# Altium PCB SPSGRFCpcb.PcbDoc
Units mm, origin at the board's own origin, x right, y up, seen from the top; angles counter-clockwise.
Board outline 30.48 x 30.25 mm, 2 copper layers (Top Layer, Bottom Layer); 3 components, 11 nets, 26 pads, 0 vias.
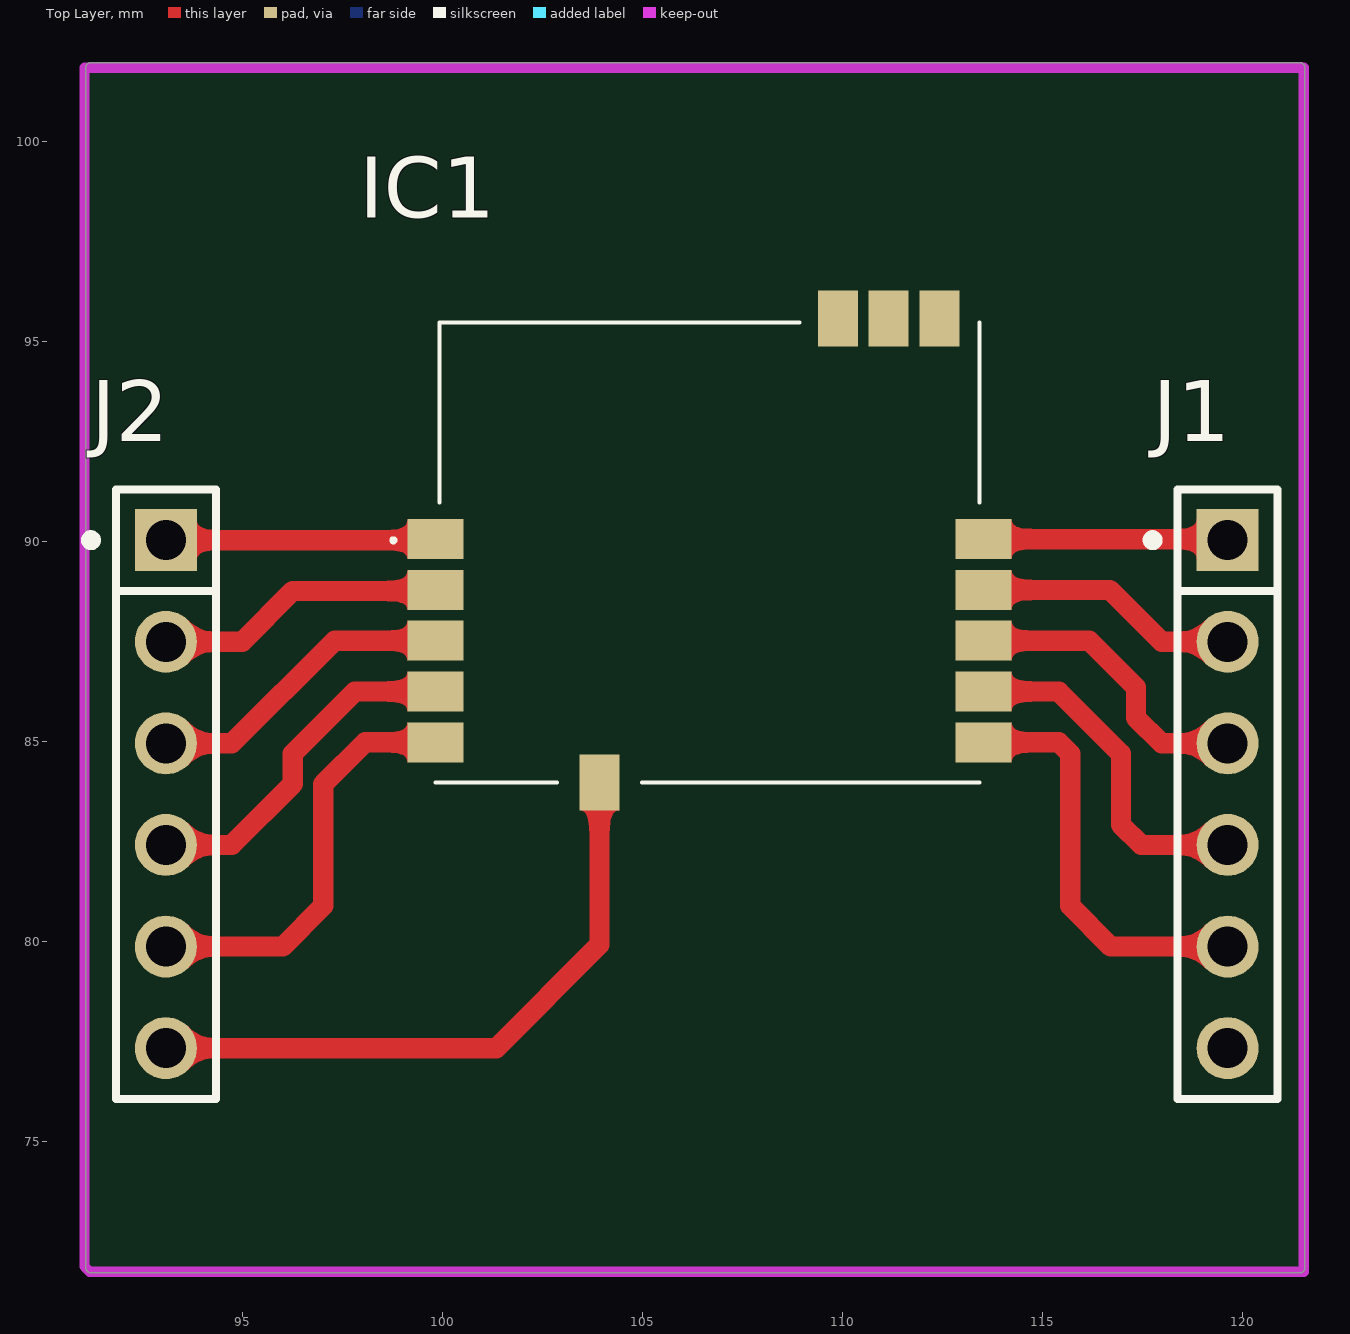
[diagram p0: Top Layer view]
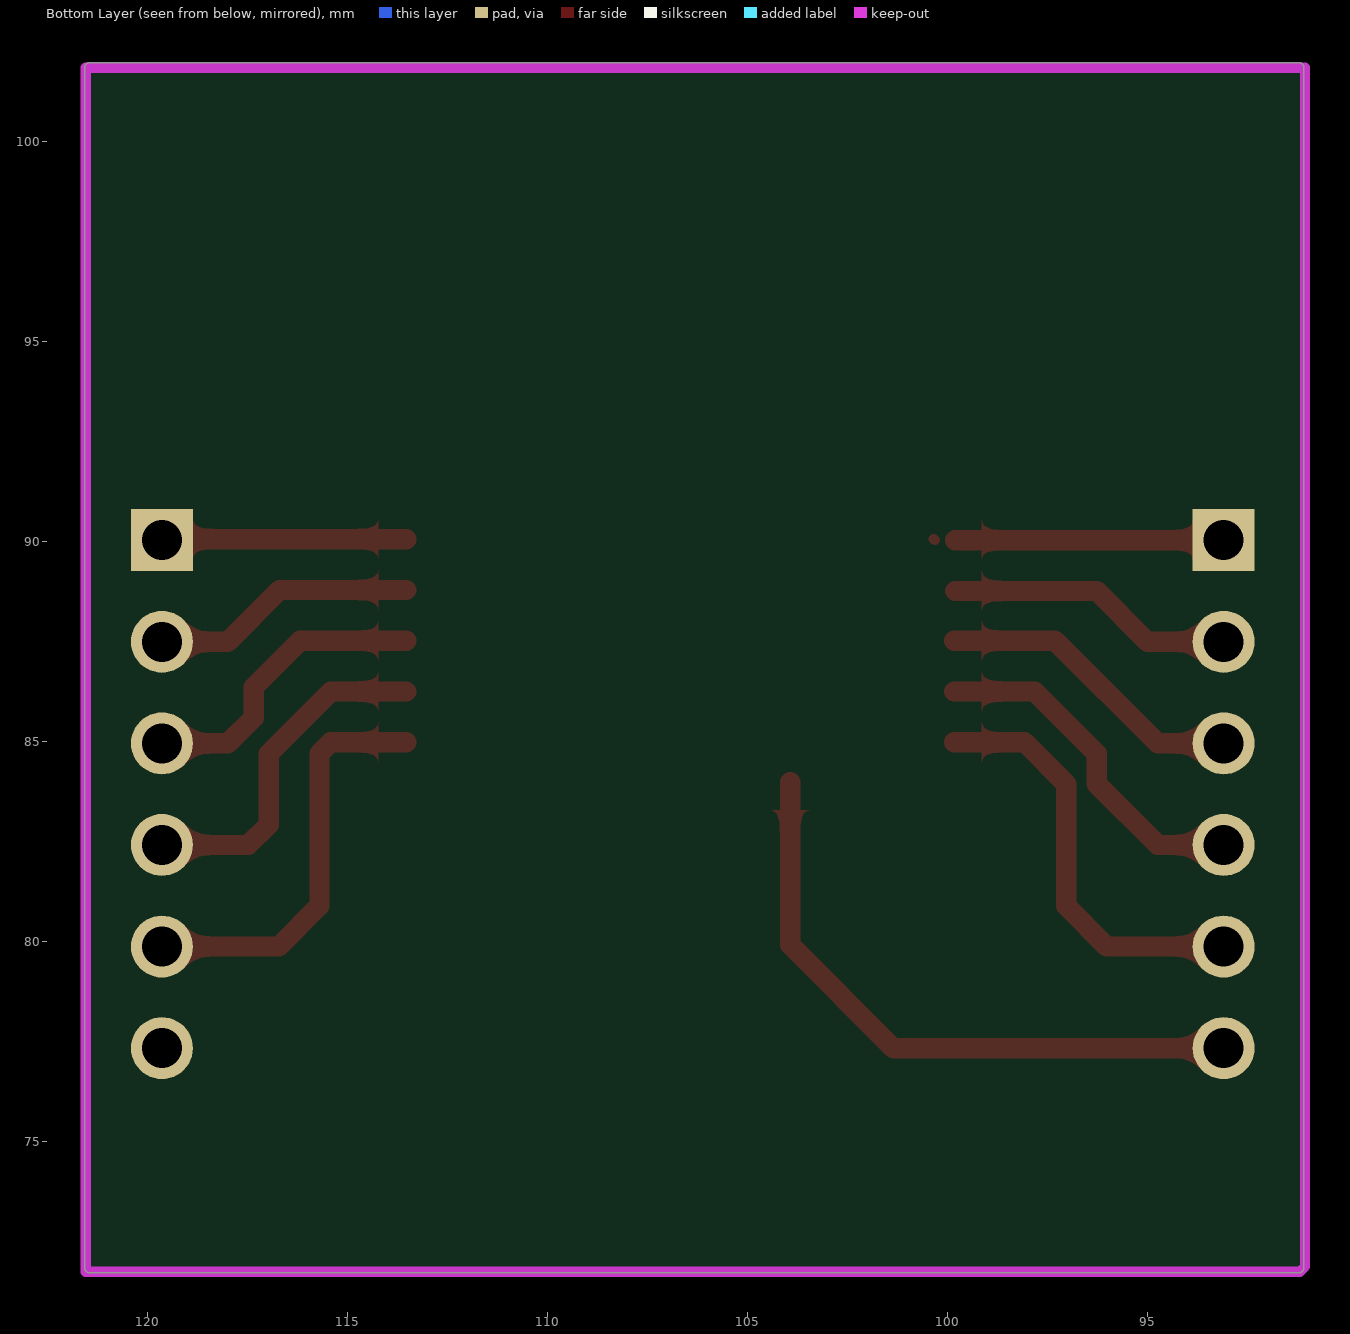
[diagram p1: Bottom Layer view, seen from below]
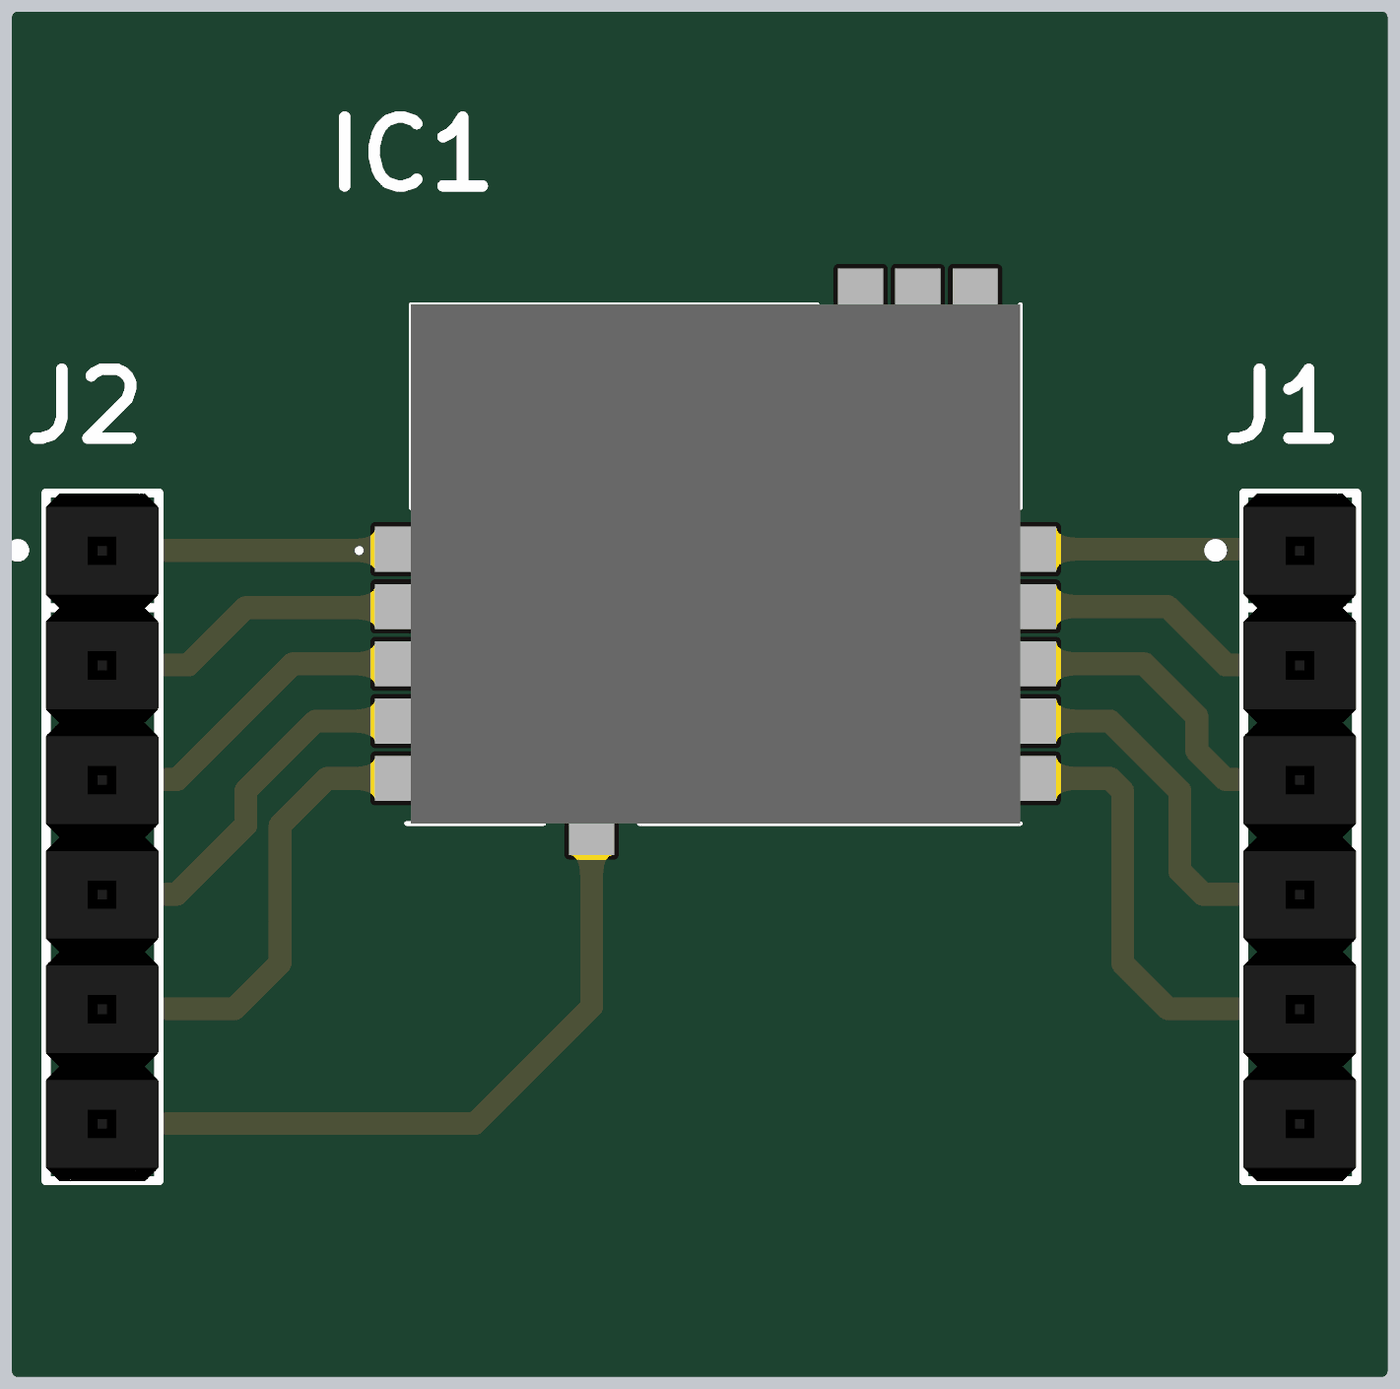
[diagram p2: 3D render of the assembled board from above, using the file's embedded part models]

## Layer stack, top to bottom
Top Solder: solder mask 0.0102, Solder Resist, Dk 3.5
Top Layer: signal copper 0.0356
Dielectric 1: dielectric 0.32, FR-4, Dk 4.8
Bottom Layer: signal copper 0.0356
Bottom Solder: solder mask 0.0102, Solder Resist, Dk 3.5

## Board outline
91.087,71.854 91.087,101.854 cw(c91.214,101.854) 91.214,101.981 121.44,101.981 cw(c121.44,101.854) 121.567,101.854 121.567,71.854 cw(c121.44,71.854) 121.44,71.727 91.214,71.727 cw(c91.214,71.854)

## Design rules (kind name [scope] priority, off if disabled: settings)
Clearance [All] p1: gap=0.254 ignorepadtopadclearanceinfootprint=FALSE except(0: Arc-Hole Track-Hole SMDPad-Hole THPad-Hole Via-Hole Fill-Hole Poly-Hole Region-Hole Text-Hole)
MinimumSolderMaskSliver [All] p1: minsoldermaskwidth=0.01
PolygonConnect [All] p1: connectstyle=Relief reliefconductorwidth=0.254 reliefentries=4 polygonreliefangle="90 Angle" airgapwidth=0.254
RoutingVias [All] p1: holewidth=0.711 width=1.27 viastyle="Through Hole" minholewidth=0.711 minwidth=1.27 maxholewidth=0.711 maxwidth=1.27
SolderMaskExpansion [All] p1: expansion=0.102
Width [All] p1: maxlimit=1 minlimit=0.254 preferedwidth=0.254
29 further rules are at their usual default settings.

## Classes and differential pairs
component class SPSGRFCsheet: J1 J2

## Components (designator, comment, footprint, x,y, rotation, side; value= is the part's Value field where it differs from the comment)
IC1 "SPSGRFC-433" SPSGRFC433 106.68,89.789 r0 top
J1 "Conn_TE_826629-6_eec" TE_C-826629_0 119.634,83.693 r0 top
J2 "Conn_TE_826629-6_eec" TE_C-826629_0 93.091,83.693 r0 top

## Footprints (in the part's own frame and the unit in brackets; to place one, negate y for a bottom-side part, rotate by r counter-clockwise, add the part's x,y. Pads: shape width x height; smd on the part's side, far side on the other; paste and mask are expansions set on the pad)
SPSGRFC433 [mm]
  rect 1.4x1 smd: 1(-6.85,0.28) 2(-6.85,-0.99) 3(-6.85,-2.26) 4(-6.85,-3.53) 5(-6.85,-4.8) 7(6.85,-4.8) 8(6.85,-3.53) 9(6.85,-2.26) 10(6.85,-0.99) 11(6.85,0.28)
  rect 1x1.4 smd: 6(-2.75,-5.8) 12(5.75,5.8) 13(4.48,5.8) 14(3.21,5.8)
  silkscreen extent -7.95,-5.8 6.75,5.7, body extent -6.75,-5.8 6.75,5.7, height 3.1
TE_C-826629_0 [mm]
  rect 1.55x1.55 hole 1 paste-1000 mask+0: 1(0,6.35)
  round 1.55 hole 1 paste-1000 mask+0: 2(0,3.81) 3(0,1.27) 4(0,-1.27) 5(0,-3.81) 6(0,-6.35)
  silkscreen extent -2,-7.62 1.25,7.62, body extent -1.26,-7.63 1.24,7.61, height 9.51

## Part data
IC1: "Integrated Circuit", Manufacturer_Name=STMicroelectronics, Mouser Part Number=511-SPSGRFC-433, Arrow Part Number=SPSGRFC-433, Arrow Price/Stock=https://www.arrow.com/en/products/spsgrfc-433/stmicroelectronics, Datasheet Link=https://www.st.com/resource/en/datasheet/spsgrfc.pdf, Height=3mm, Manufacturer_Part_Number=SPSGRFC-433, Mouser Price/Stock=https://www.mouser.co.uk/ProductDetail/STMicroelectronics/SPSGRFC-433?qs=Mv7BduZupUhtphlGS%2FoEmw%3D%3D
J1 J2: "CONN HEADER BRKWAWAY 6POS AU", Digikey Part Number=A121495-ND, Manufacturer=TE, Mfg Package Ident=C-826629, Mouser Part Number=571-826629-6, Part Number=826629-6, Temperature=to, ComponentLink1Description=Upverter, ComponentLink1URL=https://upverter.com/upn/revision/017f1bdfe55378c0/, ComponentLink2Description=Datasheet, ComponentLink2URL=http://www.te.com/commerce/DocumentDelivery/DDEController?Action=srchrtrv&DocNm=826629&DocType=Customer+Drawing&DocLang=English&DocFormat=pdf&PartCntxt=826629-6, Digikey Description="CONN HEADER BRKWAWAY 6POS AU", helpURL=https://upverter.com/upn/revision/017f1bdfe55378c0/, Ipc Land Pattern Name=SIP250W63P254L1524H711Q6, Lead Free=yes, Num Pins=6, Package=C-826629, Price=0.393365307724, RoHS=TRUE, Supplier 1=Digi-Key, Supplier 2=Mouser, Supplier Part Number 1=A121495-ND, Supplier Part Number 2=571-826629-6, Symbol 0 0=Standard, Type="integrated circuit"

## Nets (pads, with @x,y where several pads share a name; then routed paths per layer and width w, separated by ;. In a path a pad name is that pad's centre, name@x,y a point inside that pad or via, vN(x,y) a via of type N, cw(c..) or ccw(c..) an arc to the next point about the centre after c; other vN are vias at no path point)
CLK: IC1.7 J1.5 | length 10.5
  Top Layer w0.508: IC1.7 115.417,84.989 115.697,84.709 115.697,80.899 116.713,79.883 J1.5
CS: IC1.10 J1.2 | length 6.6
  Top Layer w0.508: IC1.10 116.687,88.799 117.983,87.503 J1.2
GP0: IC1.4 J2.4 | length 8.8
  Top Layer w0.508: J2.4 94.742,82.423 96.266,83.947 96.266,84.709 97.816,86.259 IC1.4
GP1: IC1.3 J2.3 | length 7.8
  Top Layer w0.508: J2.3 94.742,84.963 97.308,87.529 IC1.3
GP2: IC1.2 J2.2 | length 7.3
  Top Layer w0.254: IC1.2@99.804,88.773 IC1.2
  Top Layer w0.508: J2.2 94.996,87.503 96.266,88.773 IC1.2@99.804,88.773
GP3: IC1.1 J2.1 | length 6.8
  Top Layer w0.254: IC1.1@99.804,90.043 IC1.1 ; IC1.1@100.312,90.043 IC1.1@100.338,90.069
  Top Layer w0.508: J2.1 IC1.1@99.804,90.043
Ground: IC1.6 J2.6 | length 16
  Top Layer w0.508: J2.6 101.346,77.343 103.93,79.927 IC1.6
MISO: IC1.8 J1.4 | length 8.7
  Top Layer w0.508: IC1.8 115.417,86.259 116.967,84.709 116.967,82.931 117.475,82.423 J1.4
MOSI: IC1.9 J1.3 | length 7.6
  Top Layer w0.508: IC1.9 116.179,87.529 117.342,86.366 117.342,85.604 117.983,84.963 J1.3
SDN: IC1.11 J1.1 | length 6.1
  Top Layer w0.254: J1.1@119.608,90.069 J1.1
  Top Layer w0.508: IC1.11 J1.1@119.608,90.069
V3.3: IC1.5 J2.5 | length 10.6
  Top Layer w0.508: J2.5 96.012,79.883 97.028,80.899 97.028,83.947 98.07,84.989 IC1.5
pads on no net: IC1.12 IC1.13 IC1.14 J1.6

## Keep-outs
Keep-Out Layer:
  lines w0.254: 91.059,71.882 91.186,71.755 121.539,71.755 121.539,101.854 91.059,101.854 91.059,71.882